# Altium PCB CH572D-R0-1v2.PcbDoc
Units mil, origin at the board's own origin, x right, y up, seen from the top; angles counter-clockwise.
Board outline 1574.8 x 1811.02 mil, 2 copper layers (Top Layer, Bottom Layer); 27 components, 29 nets, 122 pads, 248 vias.
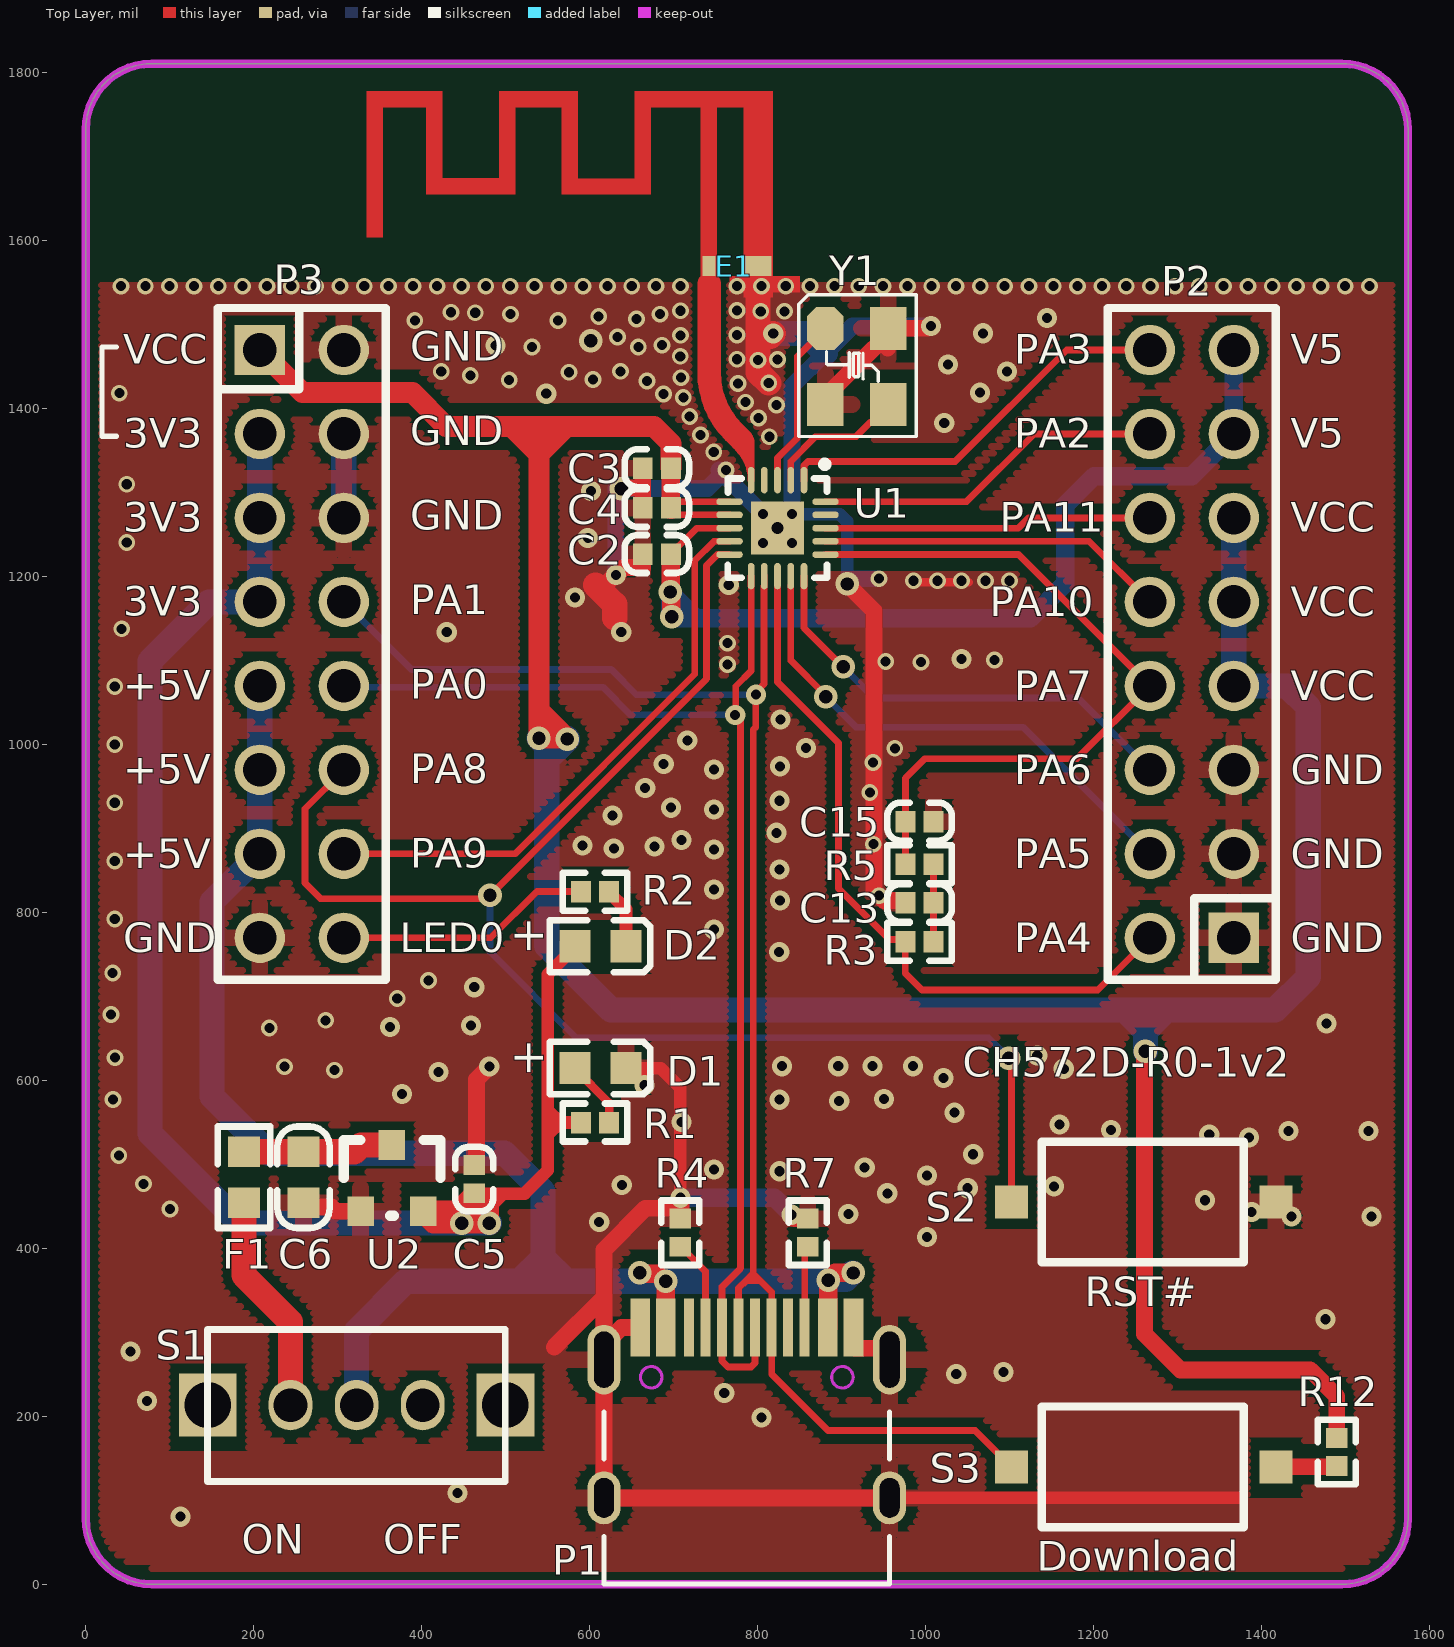
[diagram p0: Top Layer view]
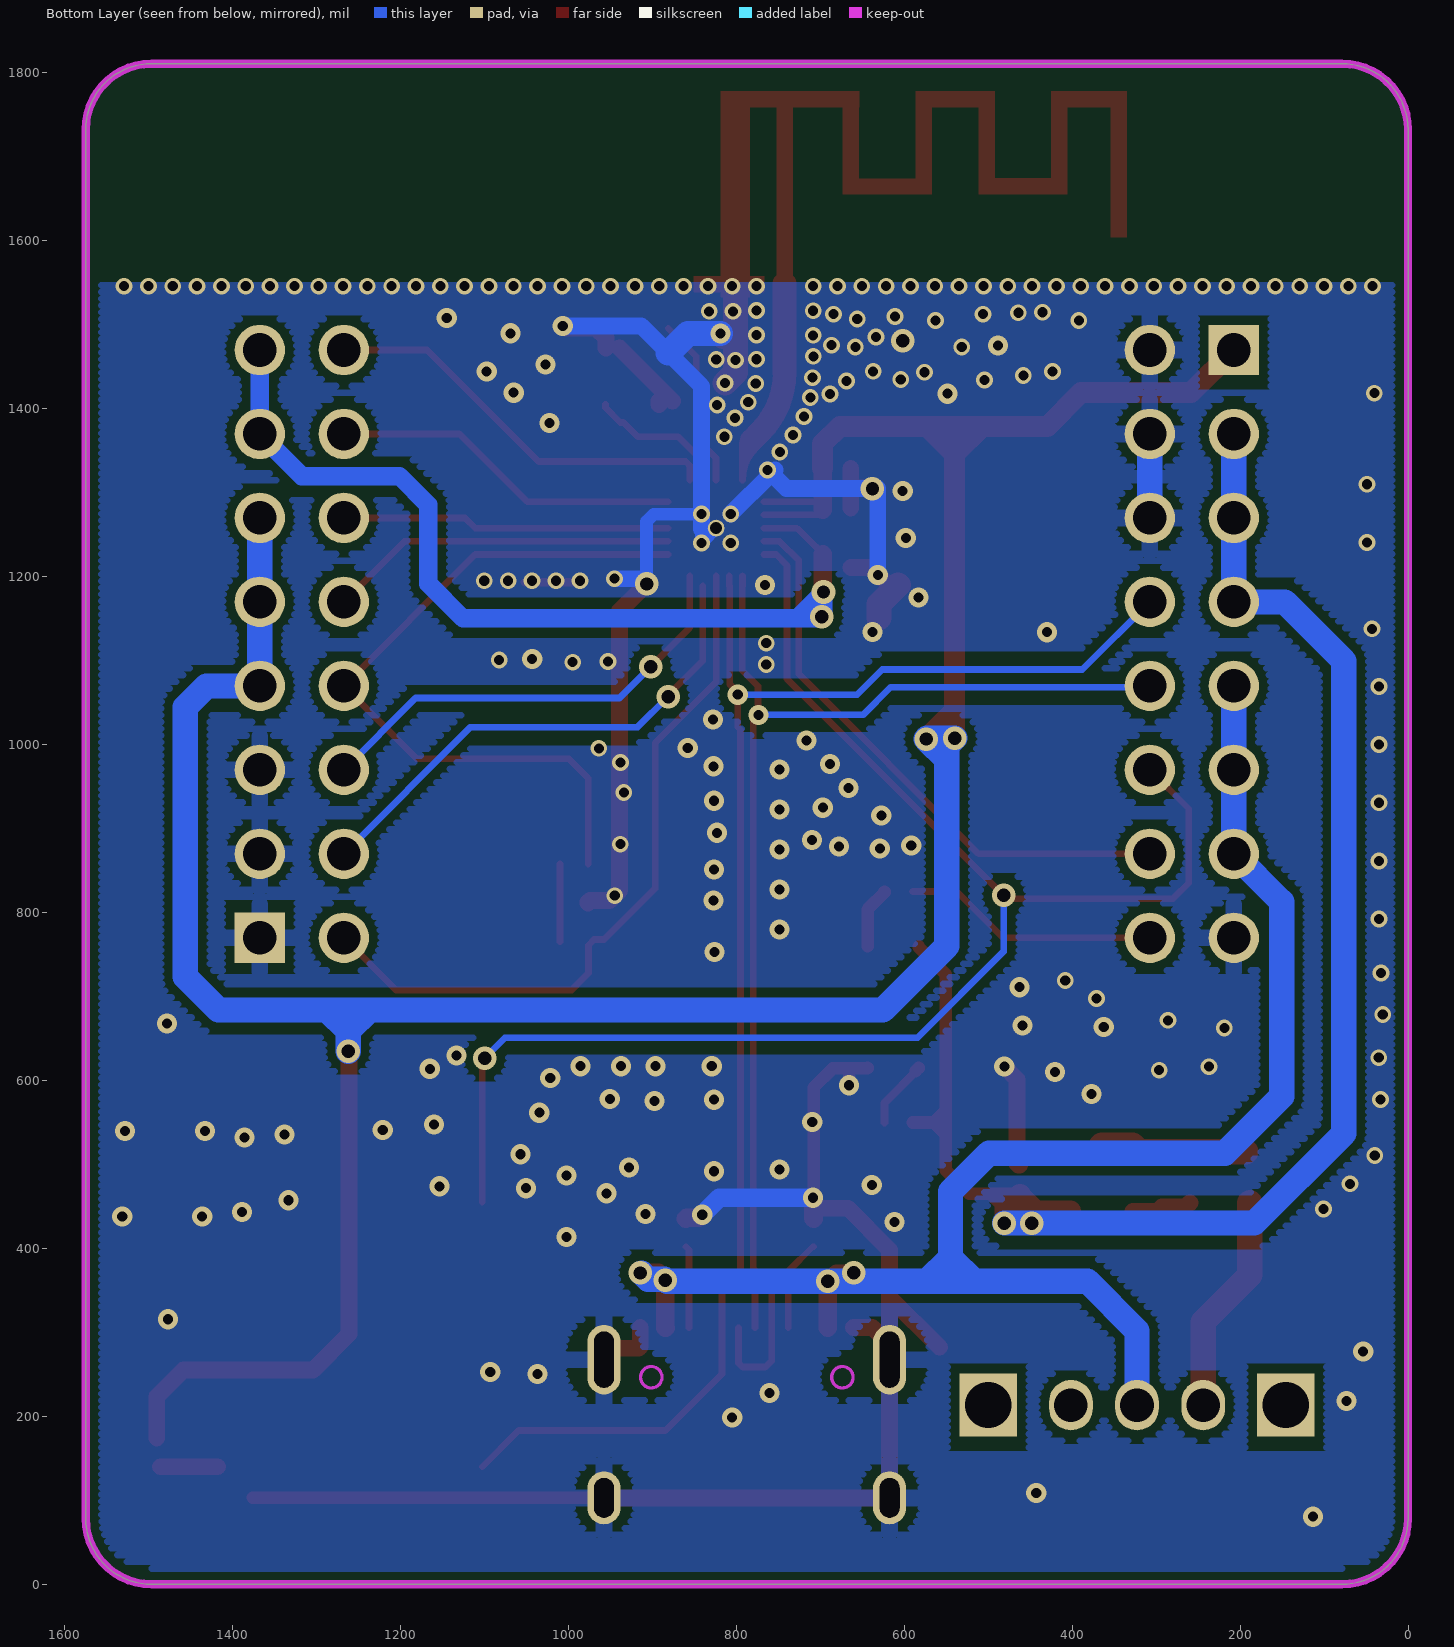
[diagram p1: Bottom Layer view, seen from below]

## Layer stack, top to bottom
Top Solder: solder mask 0.4, Solder Resist, Dk 3.5
Top Layer: signal copper 1.4
Dielectric 1: dielectric 12.6, FR-4, Dk 4.8
Bottom Layer: signal copper 1.4
Bottom Solder: solder mask 0.4, Solder Resist, Dk 3.5

## Board outline
0,78.74 0,1732.28 cw(c78.74,1732.28) 78.74,1811.02 1496.06,1811.02 cw(c1496.06,1732.28) 1574.8,1732.28 1574.8,78.74 cw(c1496.06,78.74) 1496.06,0 78.74,0 cw(c78.74,78.74)

## Design rules (kind name [scope] priority, off if disabled: settings)
Clearance Clearance_2 [InNet('ANT') vs InPolygon] p1: gap=6 ignorepadtopadclearanceinfootprint=FALSE
Clearance Clearance_1 [InPolygon] p2: gap=10 ignorepadtopadclearanceinfootprint=FALSE
Clearance [All] p3: gap=6 ignorepadtopadclearanceinfootprint=FALSE except(8: Arc-Via Track-Via SMDPad-Via THPad-Via Via-Via Via-Fill Via-Poly Via-Region Via-Hole)
ComponentClearance [All] p1 off: gap=10 collisioncheckmode=3 verticalgap=10 showdistances=FALSE
DiffPairsRouting [All] p1: maxlimit=10 minlimit=7 mostfreqgap=8 toplayer_minwidth=6 toplayer_maxwidth=15 toplayer_prefwidth=8 bottomlayer_minwidth=6 bottomlayer_maxwidth=15 bottomlayer_prefwidth=8 maxuncoupledlength=500
MinimumSolderMaskSliver [All] p1 off: minsoldermaskwidth=10
PolygonConnect PolygonConnect_1 [IsVia] p1: connectstyle=Direct reliefconductorwidth=10 reliefentries=4 polygonreliefangle="90 Angle" airgapwidth=10
PolygonConnect [All] p2: connectstyle=Relief reliefconductorwidth=20 reliefentries=4 polygonreliefangle="90 Angle" airgapwidth=10
RoutingVias [All] p1: holewidth=16 width=28 viastyle="Through Hole" minholewidth=12 minwidth=20 maxholewidth=28 maxwidth=50
SilkToSilkClearance [All] p1 off: silktosilkclearance=10
SilkToSolderMaskClearance [IsPad] p1 off: minsilkscreentomaskgap=10 clearancetoexposedcopper=TRUE
SolderMaskExpansion [All] p1: expansion=2 istentingtop=FALSE
Width [All] p1: maxlimit=100 minlimit=5 preferedwidth=10
25 further rules are at their usual default settings.

## Classes and differential pairs
differential pair NewDifferentialPair1: +PA0 -BOOT

## Components (designator, comment, footprint, x,y, rotation, side; value= is the part's Value field where it differs from the comment)
C2 "2.2uF" 0402_C 697,1227 r270 top
C3 "2.2uF" 0402_C 697,1329.28 r270 top
C4 "0.1uF" 0402_C 697,1281.85 r270 top
C5 "2.2uF" 0402_C 462.74,499.29 r0 top value=100pF
C6 "10uF" 0603_C 259.53,515.11 r270 top
C13 "NC(10nF)" 0402_C 1009.83,811.48 r270 top
C15 "NC(10nF)" 0402_C 976.37,908.28 r90 top
D1 "POWER" 0603+ 582.85,615 r0 top
D2 "LED0" 0603+ 582.85,760 r0 top
E1 "ANTENNA" ANT-F-1-2.4G-1.6mmFR4 742.48,1570 r0 top
F1 "500mA" 0603 188.57,454.48 r90 top
P1 "TYPE-C-Receptacle-2.0" TYPE-C-Receptacle-2.0 787.4,305.76 r0 top
P2 "HEADER 8x2" IDC16-2.54mm 1367.32,770 r180 top
P3 "HEADER 8x2" IDC16-2.54mm 207.48,1470 r0 top
R1 "1K" 0402 623.48,550 r180 top
R2 "1K" 0402 590.02,825 r0 top
R3 "NC(2.2K)" 0402 976.37,765.15 r0 top
R4 "5.1K" 0402 707.92,402.06 r90 top
R5 "NC(2.2K)" 0402 1009.83,857.8 r180 top
R7 "5.1K" 0402 859.9,435.53 r270 top
R12 "5.1K" 0402 1490,140.82 r90 top
S1 "SW" SW1 322.7,213.56 r0 top
S2 "RST#" SMD_6.1x3.65x2.5mm-KEY 1417.44,455.39 r180 top
S3 "Download" SMD_6.1x3.65x2.5mm-KEY 1417.44,140 r180 top
U1 "CH572D" QFN20_3X3 823.98,1257.87 r180 top
U2 "6219P33M" SOT-23 364.82,483.8 r0 top
Y1 "32MHz" XT3225 880.97,1495.79 r270 top

## Footprints (in the part's own frame and the unit in brackets; to place one, negate y for a bottom-side part, rotate by r counter-clockwise, add the part's x,y. Pads: shape width x height; smd on the part's side, far side on the other; paste and mask are expansions set on the pad)
0402 [mm]
  rect 0.6x0.65 smd mask+0.051: 1(0,0) 2(0.85,0)
  silkscreen extent -0.55,-0.58 1.4,0.57
0402_C [mm]
  rect 0.65x0.6 smd mask+0.051: 1(0,0) 2(0,-0.85)
  silkscreen extent -0.58,-1.4 0.57,0.55
0603 [mm]
  rect 0.93x0.98 smd: 1(0,0) 2(1.54,0)
  silkscreen extent -0.76,-0.79 2.3,0.79
0603+ [mm]
  rect 0.93x0.98 smd: 1(0,0) 2(1.54,0)
  silkscreen extent -0.76,-0.79 2.27,0.79
0603_C [mm]
  rect 0.93x0.98 smd mask+0.051: 1(0,0) 2(1.54,0)
  silkscreen extent -0.76,-0.79 2.31,0.79
ANT-F-1-2.4G-1.6mmFR4 [mm]
  rect 0.8x0.6 smd mask+0: 0(1.483,0)
  rect 0.4x0.6 smd mask+0: 1(0,0)
  Top Layer region: 0.24,5.027 -0.26,5.027 -0.26,-0.304 0.24,-0.304
  Top Layer region: 1.94,5.002 1.04,5.002 1.04,-0.304 1.94,-0.304
  Top Layer region: 1.94,5.296 -2.26,5.296 -2.26,4.796 1.94,4.796
  Top Layer region: -1.76,4.977 -2.26,4.977 -2.26,2.157 -1.76,2.157
  Top Layer region: -1.85,2.651 -4.39,2.651 -4.39,2.156 -1.85,2.156
  Top Layer region: -3.96,4.976 -4.46,4.976 -4.46,2.156 -3.96,2.156
  Top Layer region: -3.96,5.296 -6.36,5.296 -6.36,4.796 -3.96,4.796
  Top Layer region: -5.861,4.977 -6.361,4.977 -6.361,2.157 -5.861,2.157
  Top Layer region: -5.875,2.657 -8.364,2.657 -8.364,2.157 -5.875,2.157
  Top Layer region: -8.061,4.977 -8.561,4.977 -8.561,2.157 -8.061,2.157
  Top Layer region: -8.06,5.296 -10.36,5.296 -10.36,4.796 -8.06,4.796
  Top Layer region: -9.86,4.976 -10.36,4.976 -10.36,0.856 -9.86,0.856
IDC16-2.54mm [mil]
  rect 60x60 hole 40: 1(0,0)
  round 60 hole 40: 2(100,0) 3(0,-100) 4(100,-100) 5(0,-200) 6(100,-200) 7(0,-300) 8(100,-300) 9(0,-400) 10(100,-400) 11(0,-500) 12(100,-500) 13(0,-600) 14(100,-600) 15(0,-700) 16(100,-700)
  silkscreen extent -50,-750 150,50
QFN20_3X3 [mm]
  rect 1.6x1.6 smd mask+0.051: 0(0,0)
  round 0.508 hole 0.356: 0(0,0)
  oval 0.2x0.8 smd mask+0.051: 1(-0.8,-1.451) 2(-0.4,-1.451) 3(0,-1.451) 4(0.4,-1.451) 5(0.8,-1.451) 11(0.8,1.451) 12(0.4,1.451) 13(0,1.451) 14(-0.4,1.451) 15(-0.8,1.451)
  oval 0.8x0.2 smd mask+0.051: 6(1.451,-0.8) 7(1.451,-0.4) 8(1.451,0) 9(1.451,0.4) 10(1.451,0.8) 16(-1.451,0.8) 17(-1.451,0.4) 18(-1.451,0) 19(-1.451,-0.4) 20(-1.451,-0.8)
  silkscreen extent -1.53,-2.03 1.5,1.5
SMD_6.1x3.65x2.5mm-KEY [mm]
  rect 1x1 smd: 1(0,0) 2(8,0)
  silkscreen extent 0.98,-1.83 7.08,1.83
SOT-23 [mm]
  rect 0.8x0.9 smd: 1(-0.95,-1) 2(0.95,-1) 3(0,1)
  silkscreen extent -1.46,-1.14 1.46,1.15
SW1 [mm]
  rect 1.75x1.9 hole 1.4: 0(-4.5,0) 0(4.5,0)
  oval 1.321x1.524 hole 1.016: 1(0,0) 2(-2,0) 3(2,0)
  silkscreen extent -4.51,-2.31 4.5,2.29
TYPE-C-Receptacle-2.0 [mm]
  oval 1x1.6 hole 0.6 slot 1.2 at 90 deg: 0(-4.32,-5.15) 0(4.32,-5.15)
  oval 1x2.1 hole 0.6 slot 1.7 at 90 deg: 0(-4.32,-0.97) 0(4.32,-0.97)
  rect 0.6x1.75 smd mask+0.051: A1(-3.225,0) A4(-2.45,0) B1(3.225,0) B4(2.45,0)
  rect 0.3x1.75 smd mask+0.051: A5(-1.25,0) A6(-0.25,0) A7(0.25,0) A8(1.25,0) B5(1.75,0) B6(0.75,0) B7(-0.75,0) B8(-1.75,0)
  Keep-Out Layer circle w0.1: c2.89,-1.5 r0.325
  Keep-Out Layer circle w0.1: c-2.89,-1.5 r0.325
  silkscreen extent -4.32,-7.75 4.32,-2.55
XT3225 [mm]
  oct 1.3x1.1 smd: 1(0,0)
  rect 1.3x1.1 smd: 2(2.3,0) 3(2.3,1.9) 4(0,1.9)
  silkscreen extent -1.02,-0.8 3.27,2.74

## Part data
C2 C3 C4 C6 C13 C15: library part CAP, "Capacitor"
C5: library part Cap, "Capacitor", LatestRevisionDate=17-Jul-2002, LatestRevisionNote="Re-released for DXP Platform.", PackageReference=RAD-0.3, Published=8-Jun-2000, Publisher="Altium Limited"
D1: library part LED0, "Typical INFRARED GaAs LED", LatestRevisionDate=08-Jul-2005, LatestRevisionNote="Mech Layer 1 removed.", PackageReference=LED-0, Published=8-Jun-2000, Publisher="Altium Limited"
D2: "Typical INFRARED GaAs LED", LatestRevisionDate=08-Jul-2005, LatestRevisionNote="Mech Layer 1 removed.", PackageReference=LED-0, Published=8-Jun-2000, Publisher="Altium Limited"
E1: "Generic Antenna"
F1: library part FUSE1, "Fuse"
P1: "Type-C USB2.0 母座"
P2 P3: "Header, 8-Pin, Dual row"
R1 R2 R3 R5: library part RES
R4 R7 R12: library part RES2
S2 S3: library part SW-PB, "Switch", LatestRevisionDate=17-Jul-2002, LatestRevisionNote="Re-released for DXP Platform.", PackageDescription="Switch; 2 Leads", PackageReference=SPST-2, Published=24-Mar-1999, Publisher="Altium Limited"
U1: "RISC-V MCU with BLE/2.4GHz Wireless/USB/SPI/UART/I2C/PWM/CMP"
Y1: library part 晶体

## Via types
v1: diameter 20, hole 12, Top Layer to Bottom Layer, tented both sides, 135 vias
v2: diameter 24, hole 12, Top Layer to Bottom Layer, tented both sides, 95 vias
v3: diameter 28, hole 16, Top Layer to Bottom Layer, tented both sides, 18 vias

## Nets (pads, with @x,y where several pads share a name; then routed paths per layer and width w, separated by ;. In a path a pad name is that pad's centre, name@x,y a point inside that pad or via, vN(x,y) a via of type N, cw(c..) or ccw(c..) an arc to the next point about the centre after c; other vN are vias at no path point)
+3V3: C5.2 D2.1 P3.3 P3.5 P3.7 R1.2 U2.2 | length 2118.8
  Top Layer w15: C5.2@462.74,465.43 497.68,465.43 ; 480.05,448.12 480.37,448.12 497.68,465.43 ; D2.1 582.85,759.02 550.27,726.44 550.27,565.09 ; R1.2 565.36,550 ; 497.68,465.43 522.64,465.43 550.27,493.06 550.27,534.91 ; 550.27,534.91 550.27,548.28 ; 550.27,534.91 565.36,550 ; 550.27,548.28 550.27,565.09 ; 550.27,548.28 551.99,550 565.36,550 ; 550.27,565.09 565.36,550
  Top Layer w25: 441.74,443.43 C5.2@462.24,463.93 ; 441.74,444.43 421.98,444.43 ; C5.2@461.74,464.43 C5.2@462.24,463.93 ; 462.74,447.07 462.74,448.07 ; 479.05,447.12 C5.2@462.74,463.43 ; 480.05,448.12 v3@480.05,430.76 ; v3@481.2,430.76 v3(480.63,430.18) ; 421.98,444.43 U2.2 402.22,442.46 414.5,430.18 v3@436.23,430.18 ; 421.98,444.43 v3@436.23,430.18 ; v3@436.23,430.18 v3(448.12,430.18) v3(480.63,430.18) ; C5.2@462.24,463.93 462.74,464.43 C5.2@462.74,463.43 ; C5.2@462.24,463.93 C5.2@462.74,463.43 ; 462.74,448.07 v3@480.05,430.76 ; 462.74,448.07 C5.2@462.74,463.43 ; v3@480.05,430.76 v3(480.63,430.18)
  Bottom Layer w30: P3.3 P3.5 P3.7 146.73,1170 76.52,1099.79 76.52,536.79 183.13,430.18 v3(448.12,430.18) v3(480.63,430.18)
+5V: P1.A4 P1.B4 P3.9 P3.11 P3.13 S1.1 | length 2028.8
  Top Layer w22: v3(659.88,371.23) 661.03,370.09 680.28,370.09 689.34,361.03 v3(690.96,361.03) ; P1.A4 v3(690.96,361.03) ; P1.B4 884.46,305.76 v3(884.46,362.35) 892.97,370.86 v3(914.16,370.86)
  Bottom Layer w22: v3@882.6,361.03 883.91,362.35 v3(884.46,362.35) v3@885.6,363.49 ; v3@912.54,370.86 v3(914.16,370.86)
  Bottom Layer w30: P3.9 P3.11 P3.13 150.42,812.94 150.42,581.01 217.94,513.49 498.9,513.49 544.68,467.71 544.68,388.93 ; S1.1 322.7,301.96 381.77,361.03 516.78,361.03 ; v3@882.6,361.03 v3(690.96,361.03) 572.59,361.03 ; v3@885.6,363.49 905.17,363.49 v3@912.54,370.86 ; 516.78,361.03 544.68,361.03 ; 516.78,361.03 544.68,388.93 ; 544.68,361.03 544.68,388.93 ; 544.68,361.03 572.59,361.03 ; 544.68,388.93 572.59,361.03
ANT: E1.1 U1.5 | length 364.2
  Top Layer w8: 768.33,1361.52 776.66,1353.19 cw(c738.48,1315) U1.5 792.48,1335.28 ; 781,1363 cw(c753.28,1335.28) 792.48,1335.28 ; 781.05,1356.9 785.27,1352.69 cw(c767.87,1335.28) 792.48,1335.28 ; 788.1,1370.05 cw(c777.52,1359.47) 792.48,1359.47 792.48,1335.28
  Top Layer w28.1: 742.48,1549 742.48,1442.94 ccw(c842.48,1442.94) 771.77,1372.23 781,1363
BOOT: P1.A6 P1.B6 P3.8 S3.2 U1.12 | length 1921.7
  Top Layer w8: P1.A6 777.56,352.82 786.23,361.49 ; U1.12 808.22,1189.05 807.85,1188.67 807.85,1072.17 798.19,1062.51 798.19,1020.98 794.9,1017.7 794.9,370.16 ; S3.2 1059.32,183.16 884.17,183.16 816.93,250.4 P1.B6 816.93,348.14 803.57,361.49 ; 786.23,361.49 803.57,361.49 ; 786.23,361.49 794.9,370.16 ; 794.9,370.16 803.57,361.49
  Bottom Layer w8: P3.8 388,1089.48 626.09,1089.48 656.09,1059.48 v2(798.19,1059.48)
GND: C2.2 C3.2 C4.2 C5.1 C6.2 C13.2 C15.2 D1.2 E1.0 P1.0 P1.A1 P1.B1 P2.1 P2.3 P2.5 P3.2 P3.4 P3.6 P3.15 R4.2 R7.1 S2.1 U1.0 U2.1 Y1.2 Y1.4 | length 4086.8
  Top Layer w10: v1@992.03,1193.49 992.19,1193.33 1051.58,1193.33 v1@1051.73,1193.49
  Top Layer w15: D1.2 643.87,614.61 665.66,614.61 ; v2(665.66,594.38) 665.66,614.61 ; v2@707.92,460.09 707.92,591.78 685.09,614.61 665.66,614.61 ; P1.0@957.48,103 1375.44,103
  Top Layer w20: C6.2 264.74,449.27 292.82,449.27 297.67,444.43 U2.1 ; C5.1 463.72,499.29 465.54,501.1 465.54,601.31 v2(480.75,616.53) ; 558.07,282.49 617.32,341.74 ; 607.12,1190.12 618.26,1190.12 630.33,1202.2 v2(631.41,1202.2) 632.49,1202.2 641.3,1211 663.54,1211 ; P1.0@613.62,263.71 609.76,267.57 609.76,277.53 P1.0@617.32,285.09 ; v3(637.75,1304.99) 638.33,1305.56 663.54,1305.56 ; P1.A1 637.99,305.76 P1.0@617.32,285.09 ; C4.2 663.54,1305.56 ; C3.2 663.54,1305.56 ; 708.23,447.97 666.91,447.97 617.32,398.39 617.32,341.74 ; Y1.2@875.97,1409.18 Y1.4@939.12,1472.33 ; Y1.2@891.97,1405.24 Y1.2@891.97,1409.18 ; v3(906.81,1191.33) 938.86,1159.28 938.86,825.99 950.58,814.27 974.56,814.27 976.37,812.46 C13.2 ; P1.B1 914.37,283.12 916.18,281.31 948.53,281.31 957.48,272.36 P1.0@957.48,267.57 ; Y1.4@955.12,1472.33 955.12,1484.14 966.78,1495.79 1002.83,1495.79 1005.56,1498.52 v2(1006.64,1498.52) ; P1.0@957.48,103 617.32,103 617.32,267.57 P1.0@617.32,285.09 ; P1.0@617.32,285.09 617.32,341.74
  Top Layer w22: R4.2 708.23,435.85 708.23,447.97 708.23,460.09 v2(708.55,460.41) ; v2(840.46,440.16) 841,440.16 844.83,436.34 859.09,436.34 R7.1
  Top Layer w30: 607.12,1190.12 630.05,1167.19 630.05,1150.81 ; E1.0 800.86,1545.97 800.86,1486.36 ; v1(813.53,1430.56) 800.86,1443.23 v1(800.86,1457.83) 800.86,1486.36 ; v2(818.87,1489.59) 815.64,1486.36 800.86,1486.36
  Bottom Layer w15: U1.0@823.98,1257.87 839.87,1241.97 839.87,1241.01 841.37,1239.51 v1(841.37,1240.2) 841.37,1256.77 ; v1(841.37,1274.5) 898.03,1274.5 906.81,1265.71 v3(906.81,1191.33)
  Bottom Layer w20: v2(631.41,1202.2) v3@631.41,1304.99 ; v3@634.06,1304.99 v3(637.75,1304.99) 740.41,1304.99 v1@758.25,1322.83 ; v1@753.86,1327.21 v1@758.25,1322.83 ; v1(762.66,1327.25) v1@758.25,1322.83 ; v1(806.57,1274.5) v1@758.25,1322.83 ; 841.37,1256.77 v1(841.37,1274.5) 841.37,1426.84 880.87,1466.34 913.06,1498.52 v2(1006.64,1498.52) ; v3(906.81,1191.33) 908.98,1191.33 915.33,1197.69 v1(944.8,1197.69)
  Bottom Layer w22: v2(708.55,460.41) 820.21,460.41 v2(840.46,440.16)
  Bottom Layer w30: P3.6 P3.4 ; v2(818.87,1489.59) 857.62,1489.59 880.87,1466.34
  other v1: 100.49,447.11 68.99,477.04 39.59,510.64 32.76,577.32 296.37,612.33 236.97,616.52 34.86,627.2 218.8,662.64 285.89,671.73 30.14,678.65 371.15,697.59 408.18,719.25 32.24,728.01 34.69,792.35 944.72,820.13 34.69,861.58 938.02,881.49 34.69,930.81 933.91,943.12 937.7,978.83 963.65,995.64 34.69,1000.05 34.69,1069.28 764.24,1095.36 994.76,1098.23 952.76,1099.05 1082.33,1100.9 764.24,1120.84 42.92,1137.97 986.03,1195.18 1014.55,1195.18 1043.07,1195.18 1071.6,1195.18 1100.12,1195.18 806.57,1240.2 49,1240.86 49,1310.1 748.07,1348.66 814.19,1366.69 732.25,1368.61 801.41,1389.02 719.39,1390.62 822.68,1404.35 785.7,1407.81 711.81,1413.36 688.17,1417.53 40.16,1418.52 776.8,1430.07 668.58,1433.09 504.38,1434.24 604.05,1434.82 709.08,1437.01 458.15,1439.65 575.82,1443.46 423.54,1444.54 636.89,1444.61 775.84,1458.94 823.82,1458.75 708.17,1462.48 531.46,1473.42 658.21,1473.42 686.44,1475.72 633.44,1485.52 708.35,1487.45 775.84,1487.95 392.03,1505.11 562.57,1505.11 655.91,1506.84 610.97,1509.72 506.11,1512.6 684.14,1512.6 464.05,1514.33 435.24,1514.9 803.98,1516.05 832.21,1516.05 708.35,1516.71 775.84,1516.96 42.15,1545.97 71.11,1545.97 100.08,1545.97 129.04,1545.97 158.01,1545.97 186.97,1545.97 215.94,1545.97 244.9,1545.97 273.87,1545.97 302.83,1545.97 331.8,1545.97 360.76,1545.97 389.73,1545.97 418.69,1545.97 447.66,1545.97 476.63,1545.97 505.59,1545.97 534.56,1545.97 563.52,1545.97 592.49,1545.97 621.45,1545.97 650.42,1545.97 679.38,1545.97 708.35,1545.97 775.84,1545.97 804.81,1545.97 833.77,1545.97 862.74,1545.97 891.7,1545.97 920.67,1545.97 949.64,1545.97 978.6,1545.97 1007.57,1545.97 1036.53,1545.97 1065.5,1545.97 1094.46,1545.97 1123.43,1545.97 1152.39,1545.97 1181.36,1545.97 1210.32,1545.97 1239.29,1545.97 1268.25,1545.97 1297.22,1545.97 1326.18,1545.97 1355.15,1545.97 1384.11,1545.97 1413.08,1545.97 1442.05,1545.97 1471.01,1545.97 1499.98,1545.97 1528.94,1545.97
  other v2: 112.99,80.62 442.75,108.64 804.81,198.58 73.12,218.28 760.49,227.84 1036.82,250.68 1092.9,252.74 53.41,277.39 1476.54,315.79 1002,413.77 611.62,431.72 1435.95,438.14 1531.19,438.14 908.24,441.09 1388.61,443.35 1333.12,457.44 954.69,465.72 1050.43,471.8 1153.21,474.07 638.55,475.72 1002,487.06 826.46,491.98 748.34,494.25 927.78,496.33 1056.96,512.27 1385.57,532.32 1338.06,535.56 1432.59,539.85 1527.84,539.85 1220.98,541.31 1159.75,547.8 709.44,550.6 1034.51,561.72 897.42,575.51 826.46,577.22 950.56,578.21 376.88,584.03 1021.48,603.02 420.39,610.06 1164.89,613.97 829.2,617.09 896.24,617.09 937.09,617.09 985.3,617.09 1133.29,629.99 362.37,663.82 459.08,665.43 1477.9,667.95 462.81,711.16 825.95,753.07 748.34,779.99 827.04,814.42 748.34,827.61 826.32,851.13 748.34,875.23 629.01,876.13 677.44,878.6 591.55,879.94 709.63,886.51 822.72,895.04 627.25,915.65 748.34,922.85 696.93,924.91 826.32,933.19 666.39,948.5 748.34,970.47 827.04,974.22 688.4,976.79 857.74,995.95 716.52,1004.91 827.49,1029.87 1042.99,1102.01 430.06,1133.9 637.86,1134.33 582.84,1175.2 765.91,1189.95 598.05,1245.96 601.77,1302.15 1022.55,1383.1 548.52,1417.93 1065,1419.11 1097.16,1444.2 1027.05,1452.56 488.11,1475.2 1068.86,1489.87 1144.76,1507.87
  other v3: 601.75,1480.79
LED0: P3.16 R2.1 | length 305.3
  Top Layer w8: P3.16 482.36,770 537.36,825 R2.1
NetC6_1: C6.1 F1.2 U2.3 | length 175.3
  Top Layer w30: F1.2@192.86,515.11 320.01,515.11 328.07,523.17 U2.3
NetC13_1: C13.1 R3.2 R5.1 | length 92.6
  Top Layer w8: R3.2 R5.1
NetD1_1: D1.1 R1.1 | length 86.9
  Top Layer w10: D1.1 582.85,614.02 623.48,573.39 R1.1
  Top Layer w15: D1.1 D1.1@586.43,611.42
NetD2_2: D2.2 R2.2 | length 73.3
  Top Layer w15: R2.2 623.48,824.02 643.48,804.02 D2.2
NetF1_1: F1.1 S1.2 | length 263.9
  Top Layer w30: F1.1 188.57,368.07 243.96,312.68 S1.2
NetP1_A5: P1.A5 R4.1 | length 109.4
  Top Layer w8: R4.1 708.9,402.06 738.19,372.77 P1.A5
NetP1_B5: P1.B5 R7.2 | length 97.8
  Top Layer w8: P1.B5 856.3,398.46 R7.2
NetR12_1: R12.1 S3.1 | length 68.3
  Top Layer w20: S3.1 R12.1@1485.74,140
PA0: P1.A7 P1.B7 P3.10 U1.11 | length 1520.9
  Top Layer w8: v2@773.97,1035.12 779.9,1029.19 779.9,376.38 757.87,354.35 P1.B7 757.87,266.08 765.06,258.9 792.56,258.9 797.24,263.59 P1.A7 ; v2@774.19,1035.12 774.19,1069.53 792.85,1088.19 792.85,1188.67 792.47,1189.05 U1.11
  Bottom Layer w8: P3.10 309.05,1068.43 616.06,1068.43 649.01,1035.48 v2(773.56,1035.48)
PA2: P2.14 U1.20 | length 419.6
  Top Layer w8: U1.20 1049,1289.36 1129.64,1370 P2.14
PA3: P2.16 U1.1 | length 486.4
  Top Layer w8: U1.1 855.47,1332.52 860.16,1337.21 929.98,1337.21 930.07,1337.12 1035.46,1337.12 1168.34,1470 P2.16
PA4: P2.2 R3.1 U1.13 | length 868.1
  Top Layer w8: U1.13 823.97,1074.49 896.53,1001.93 896.53,828.61 957.24,767.9 969.26,767.9 975.98,761.17 975.98,728.02 996.05,707.96 1205.28,707.96 P2.2
PA5: P2.4 U1.14 | length 612.7
  Top Layer w8: U1.14@839.78,1188.98 839.78,1100.27 881.16,1058.89 v3(881.16,1057.1)
  Bottom Layer w8: v3(881.16,1057.1) 917.41,1020.85 1116.47,1020.85 P2.4
PA6: P2.6 U1.15 | length 543.5
  Top Layer w8: U1.15 855.46,1139.14 v3(902.02,1092.58)
  Bottom Layer w8: v3(902.02,1092.58) 939.03,1055.57 1181.75,1055.57 P2.6
PA7: C15.1 P2.8 R5.2 U1.16 | length 889.8
  Top Layer w8: U1.16 1110.95,1226.37 P2.8 1180.68,983.35 999.59,983.35 976.37,960.13 C15.1 R5.2
PA8: P3.12 S2.2 U1.10 | length 1833.6
  Top Layer w8: P3.12 261.15,923.67 261.15,835.21 279.79,816.57 477.66,816.57 v3(481.57,820.49) ; v3@486.78,825.7 v3(481.57,820.49) ; U1.10 752.37,1226.37 739.46,1213.45 739.46,1078.37 v3(481.57,820.49) ; v3(1099.44,626.74) 1102.48,623.71 S2.2
  Bottom Layer w8: v3(481.57,820.49) 481.57,753.5 584.15,650.92 1075.27,650.92 v3(1099.44,626.74)
PA9: P3.14 U1.9 | length 702.6
  Top Layer w8: P3.14@297.48,870 511.28,870 725.46,1084.17 725.46,1219.25 748.32,1242.12 U1.9
PA10: P2.10 U1.17 | length 416.1
  Top Layer w8: U1.17 1195.2,1242.12 P2.10
PA11: P2.12 U1.18 | length 391.2
  Top Layer w8: U1.18 1110.8,1257.87 1122.93,1270 P2.12
V5: C2.1 P2.13 P2.15 U1.8 | length 1145.3
  Top Layer w8: C2.1 697,1227.98 704.81,1235.8 705.8,1235.8 727.87,1257.87 U1.8
  Top Layer w22: v3@697,1182.7 C2.1 ; v3@697.54,1181.79 697.54,1153.7 v3@698.08,1153.16
  Bottom Layer w22: v3@699.7,1152.16 v3(698.08,1152.16) 698.08,1153.78 696.09,1155.77 v3(696.09,1181.79) 727.55,1150.33 ; v3@700.87,1150.33 727.55,1150.33 ; P2.15 P2.13 1367.32,1369.77 1317.35,1319.8 1201.05,1319.8 1166.72,1285.47 1166.72,1191.83 1125.23,1150.33 763.5,1150.33 727.55,1150.33
VCC: C3.1 C4.1 P2.7 P2.9 P2.11 P3.1 R12.2 U1.6 U1.7 | length 3968.7
  Top Layer w8: C4.1@697,1279.85 703.24,1273.61 U1.7 ; C4.1@698.24,1289.36 U1.6
  Top Layer w20: v3@1261.14,634.04 1261.14,310.77 1261.14,297.96 1303.71,255.39 1458.42,255.39 1490,223.81 R12.2
  Top Layer w22: C4.1@697,1279.85 C4.1 C3.1
  Top Layer w25: P3.1 258.3,1419.18 389.16,1419.18 429.26,1379.07 507.02,1379.07 ; v3(573.81,1006.72) v3@572.77,1007.77 ; v3@573.81,1007.77 v3@572.77,1007.77 ; 578.19,1379.07 572.75,1379.07 ; C3.1 697,1358.68 676.6,1379.07 572.75,1379.07 ; 507.02,1379.07 539.89,1379.07 ; 507.02,1379.07 539.88,1346.21 ; 539.88,1040.65 v3@572.77,1007.77 ; 539.88,1040.65 v3(539.88,1007.77) v3@572.77,1007.77 ; 539.88,1040.65 539.88,1346.21 ; 539.88,1346.21 539.88,1379.07 ; 539.88,1346.21 572.75,1379.07 ; 539.89,1379.07 572.75,1379.07
  Bottom Layer w30: v3(1262.04,634.94) 1262.04,658.9 ; P2.11 P2.9 P2.7 1430.76,1070 1456.08,1044.68 1456.08,723.51 1416.62,684.05 1287.19,684.05 ; 549.24,982.15 v3(573.81,1006.72) 572.77,1007.77 v3(539.88,1007.77) 549.24,998.41 549.24,982.15 ; 549.24,982.15 549.24,760.3 625.49,684.05 1236.89,684.05 ; 1236.89,684.05 1262.04,658.9 ; 1236.89,684.05 1260.85,684.05 ; 1260.85,684.05 1262.04,682.86 1262.04,658.9 ; 1260.85,684.05 1287.19,684.05 ; 1262.04,658.9 1287.19,684.05
X32MI: U1.3 Y1.1 | length 204.4
  Top Layer w8: U1.3 823.98,1341.38 847.63,1365.03 847.63,1462.44 Y1.1
X32MO: U1.2 Y1.3 | length 168.8
  Top Layer w8: U1.2 839.72,1337.33 869.22,1366.82 917.36,1366.82 934.19,1383.65 938.12,1383.65 955.78,1401.3 Y1.3
pads on no net: P1.A8 P1.B8 S1.0 S1.3 U1.4 U1.19

## Polygon pours and split planes (outlines as drawn)
GND on Bottom Layer "GND" (hatched Horizontal grid 8 track 8, remove dead copper, pour order 1): 0,0 0,1811.02 1574.8,1811.02 1574.8,0
GND on Top Layer "GND" (hatched Horizontal grid 8 track 8, remove dead copper, pour order 0): 0,1811.02 1574.8,1811.02 1574.8,0 0,0 0,78.74

## Keep-outs
Keep-Out Layer:
  the board outline again, w10

## Other copper
Top Layer:
  rectangle net GND: 783.41,1532.71 818.85,1561.65
  rectangle net GND: 766.5,1538.6 850.91,1558.03
Multi-Layer:
  pour cut-out: 1574.79,1554.03 0,1554.03 0,1811.02 1574.81,1811.02

## Silkscreen, mask and mechanical layers (free items; w line width, h text height)
Top Overlay:
  lines w6: 36.83,1367.28 19.8,1367.28 19.8,1473.74 36.83,1473.74
  text "GND" at 386.81,1456.92 h35
  text "PA3" at 1105.81,1453.62 h35
  text "V5" at 1435.16,1453.62 h35
  text "VCC" at 44.65,1453.4 h35
  text "GND" at 386.81,1356.33 h35
  text "3V3" at 44.65,1353.35 h35
  text "PA2" at 1105.81,1353.47 h35
  text "V5" at 1435.16,1353.47 h35
  text "GND" at 386.81,1255.74 h35
  text "3V3" at 44.65,1253.31 h35
  text "PA11" at 1088.32,1253.33 h35
  text "VCC" at 1435.16,1253.33 h35
  text "PA1" at 386.81,1155.15 h35
  text "3V3" at 44.65,1153.26 h35
  text "PA10" at 1076.65,1153.18 h35
  text "VCC" at 1435.16,1153.18 h35
  text "PA0" at 386.81,1054.56 h35
  text "+5V" at 44.65,1053.21 h35
  text "PA7" at 1105.81,1053.03 h35
  text "VCC" at 1435.16,1053.03 h35
  text "PA8" at 386.81,953.97 h35
  text "+5V" at 44.65,953.16 h35
  text "PA6" at 1105.81,952.89 h35
  text "GND" at 1435.16,952.89 h35
  text "+5V" at 44.65,853.11 h35
  text "PA9" at 386.81,853.38 h35
  text "PA5" at 1105.81,852.74 h35
  text "GND" at 1435.16,852.74 h35
  text "GND" at 44.65,753.06 h35
  text "LED0" at 373.81,752.79 h35
  text "PA4" at 1105.81,752.59 h35
  text "GND" at 1435.16,752.59 h35
  text "CH572D-R0-1v2" at 1044.55,604.31 h35
  text "ON" at 186.08,36.33 h35
  text "OFF" at 354.22,36.33 h35
Mechanical 1:
  the board outline again, w10

## Text inside footprints (layer, text, board x,y; h text height)
D1: Top Overlay "+" at 544.77,604.01 h40 r90
D2: Top Overlay "+" at 544.77,749.01 h40 r90